# EAGLE board PCB1 v28 (EAGLE 9.7.0)
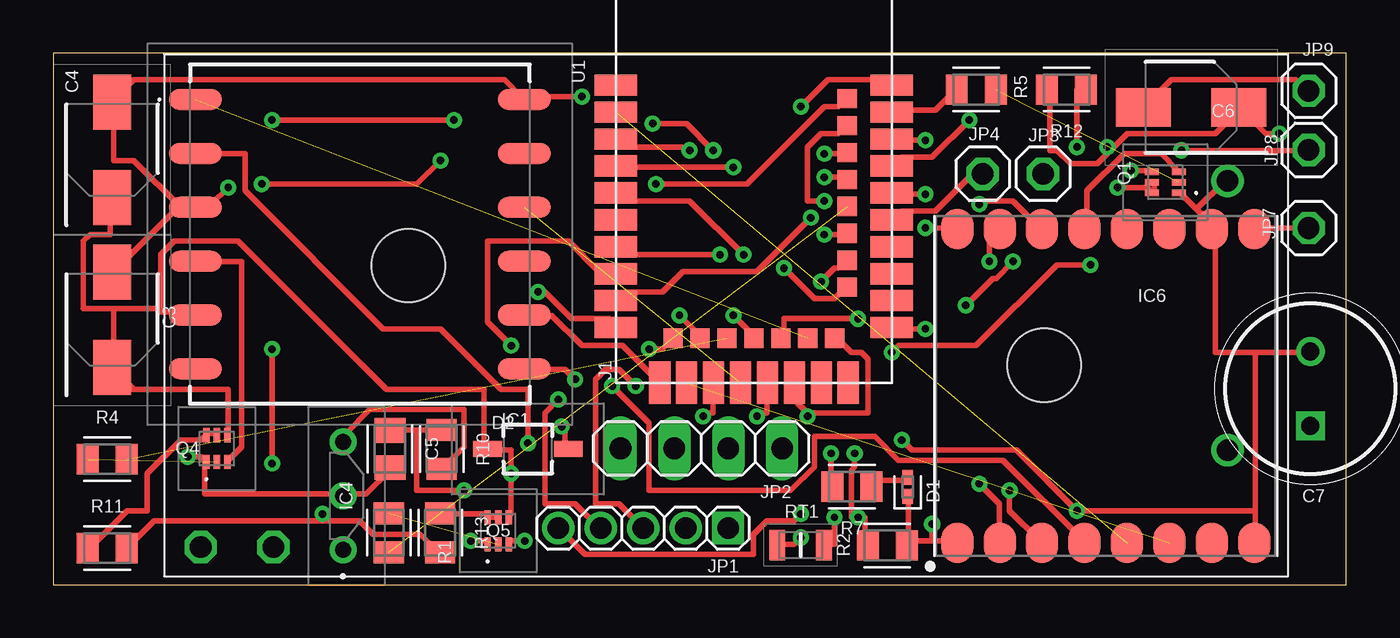
[diagram p0: board, top side]
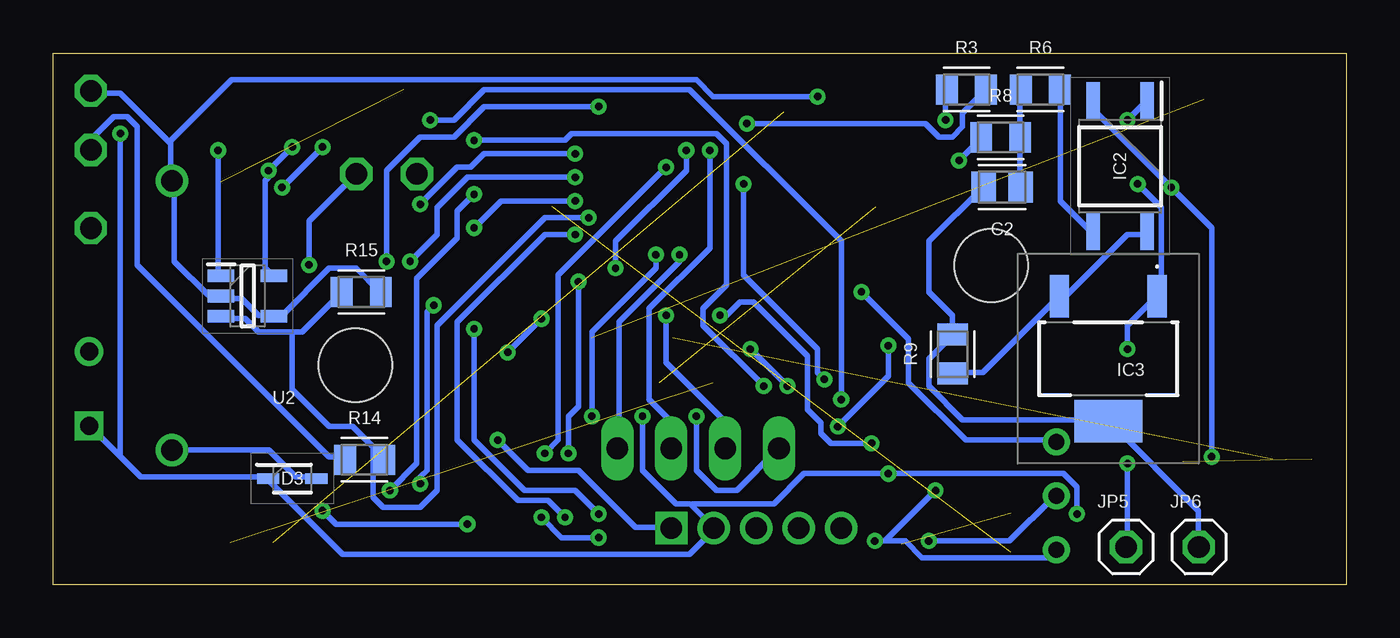
[diagram p1: board, bottom side, seen from below]

Size 60.96 x 25.07 mm. Coordinates in mm from the lower left corner, seen from the top.
Outline: 0,0 60.96,0 60.96,25.07 0,25.07 0,0
Copper layers (1*16): Top / Bottom
Stack-up Default Layer Stack: Top CuFoil:007 0.035mm / Dielectric-1 FR-4 0.2mm / Bottom CuFoil:007 0.035mm
Design rules: minimum copper width class=0 10mil, minimum copper width 6mil, minimum drill size 0.35mm, copper clearance wire_polygon to wire_polygon 8mil, copper clearance wire_polygon to pad_smd 8mil, copper clearance wire_polygon to via 8mil, copper clearance pad_smd to pad_smd 8mil, copper clearance pad_smd to via 8mil, copper clearance via to via 8mil, copper clearance smd to pad (same net) 8mil, copper clearance smd to via (same net) 8mil, copper clearance smd to smd (same net) 8mil, dimension clearance 40mil, via restrict clearance 0mil, restrict clearance 0mil, drill distance 6mil, keepout clearance 0mil
Net classes: 0 default: width 0.254 mm

## Footprints (pad centres in the part's own frame; a part is rotated, then mirrored left to right if it is on the bottom)
CAPC2012X110 = smd 1.165 x 1.465: 1 -0.875,0; 2 0.875,0
CAPAE430X610N = smd 2.6 x 1.8: 1 -2.25,0; 2 2.25,0
CAPPRD350W65D800H2000 = drill 0.85 pad 1.275 square: 1 0,0 | drill 0.85 pad 1.275: 2 3.5,0
LEDC1005X25N_FLAT-B = smd 0.7 x 0.5: A 0.45,0; C -0.45,0
VEMD2023X01 = smd 1.35 x 0.75: 1 -1.9,0; 2 1.9,0
SOD2513X115N = smd 1.05 x 0.5: 1 -1.138,0; 2 1.138,0
LC86LICMD = smd 2.5 x 1: 1 7.75,-6.35; 2 7.75,-3.81; 3 7.75,-1.27; 4 7.75,1.27; 5 7.75,3.81; 6 7.75,6.35; 7 -7.75,6.35; 8 -7.75,3.81; 9 -7.75,1.27; 10 -7.75,-1.27; 11 -7.75,-3.81; 12 -7.75,-6.35
SOP254P675X240-4N = smd 1.75 x 0.65: 1 -3.075,1.27; 2 -3.075,-1.27; 3 3.075,-1.27; 4 3.075,1.27
ACS1088SPTR = smd 0.9 x 2: 1 -2.3,-2.95; 2 2.3,-2.95 | smd 3.2 x 2: 3 0,2.95
HAL1503UAA = drill 0.76 pad 1.2: 1 0,0; 2 2.54,0; 3 5.08,0
SOT95P280X110-5N = smd 1.25 x 0.6: 1 -1.25,0.95; 2 -1.25,0; 3 -1.25,-0.95; 4 1.25,-0.95; 5 1.25,0.95
2468 = drill 1.02 pad 1.53: 1 23.625,-6.35; 2 23.625,6.35 | hole 3.45: -14.985,2.35; 14.985,-2.35
1_05X2MM = drill 1.016 pad 1.3 square: 1 -4,0 | drill 1.016 pad 1.3: 2 -2,0; 3 0,0; 4 2,0; 5 4,0
1X04 = drill 1.016 long: 1 -3.81,0; 2 -1.27,0; 3 1.27,0; 4 3.81,0
1X01 = drill 1.016 octagon: 1 0,0
DMG1029SVQ7 = smd 0.3 x 0.67: 1 -0.5,-0.635; 2 0,-0.635; 3 0.5,-0.635; 4 0.5,0.635; 5 0,0.635; 6 -0.5,0.635
RESC2012X65 = smd 1.031 x 1.42: 1 -0.919,0; 2 0.919,0
THRMC2012X95N = smd 0.75 x 1.45: 1 -1.1,0; 2 1.1,0
E73-2G4M08S1C = smd 2 x 1: 1 -6.5,5.03; 2 -6.5,3.76; 3 -6.5,2.49; 4 -6.5,1.22; 5 -6.5,-0.05; 6 -6.5,-1.32; 7 -6.5,-2.59; 8 -6.5,-3.86; 9 -6.5,-5.13; 10 -6.5,-6.4; 26 6.5,-6.4; 27 6.5,-5.13; 29 6.5,-3.86; 31 6.5,-2.59; 33 6.5,-1.32; 35 6.5,-0.05; 37 6.5,1.22; 39 6.5,2.49; 41 6.5,3.76; 43 6.5,5.03 | smd 1 x 2: 11 -4.44,-9; 13 -3.17,-9; 15 -1.9,-9; 17 -0.63,-9; 19 0.64,-9; 21 1.91,-9; 23 3.18,-9; 25 4.45,-9 | smd 0.9 x 0.9: 12 -3.81,-6.9; 14 -2.54,-6.9; 16 -1.27,-6.9; 18 0,-6.9; 20 1.27,-6.9; 22 2.54,-6.9; 24 3.81,-6.9; 28 4.4,-4.495; 30 4.4,-3.225; 32 4.4,-1.955; 34 4.4,-0.685; 36 4.4,0.585; 38 4.4,1.855; 40 4.4,3.125; 42 4.4,4.395
FP-SX1726-MOD = smd 1.917 x 1.537: 1 -7.4,7; 2 -7.4,5; 3 -7.4,3; 4 -7.4,1; 5 -7.4,-1; 6 -7.4,-3; 7 -7.4,-5; 8 -7.4,-7; 9 7.4,-7; 10 7.4,-5; 11 7.4,-3; 12 7.4,-1; 13 7.4,1; 14 7.4,3; 15 7.4,5; 16 7.4,7

## Placement (x,y rotation side)
C2  [CAPC2012X110]  16.23,18.75 180 bottom
C3  EEE-HP0J100R  [CAPAE430X610N]  2.79,12.49 90 top
C4  EEE-HP0J100R  [CAPAE430X610N]  2.78,20.5 90 top
C5  [CAPC2012X110]  15.88,6.4 270 top
C6  EEE-HP0J100R  [CAPAE430X610N]  53.64,22.5 180 top
C7  ADCR-S03R0SA305MB  [CAPPRD350W65D800H2000]  59.27,7.49 90 top
D1  LED_BLUE  [LEDC1005X25N_FLAT-B]  40.28,4.61 90 top
D2  VEMD2023X01  [VEMD2023X01]  22.38,6.41 0 top
D3  CUS520,H3F  [SOD2513X115N]  49.68,5 0 bottom
IC1  LC86LICMD  [LC86LICMD]  14.46,16.53 180 top
IC2  VOT8024AM-T  [SOP254P675X240-4N]  10.67,19.74 270 bottom
IC3  ACS108-8SP-TR  [ACS1088SPTR]  11.23,10.66 180 bottom
IC4  HAL1503UA-A  [HAL1503UAA]  13.66,1.65 90 top
IC6  TPS78230DDCT  [SOT95P280X110-5N]  51.79,13.61 0 bottom
J1  2468  [2468]  31.72,12.7 0 top
JP1  PINHD-1X55X2MM  [1_05X2MM]  27.81,2.67 180 top
JP2  PINHD-1X4  [1X04]  30.56,6.43 180 top
JP3  PINHD-1X1  [1X01]  46.66,19.38 0 top
JP4  PINHD-1X1  [1X01]  43.82,19.38 0 top
JP5  PINHD-1X1  [1X01]  10.39,1.78 0 bottom
JP6  PINHD-1X1  [1X01]  6.96,1.78 0 bottom
JP7  PINHD-1X1  [1X01]  59.18,16.81 0 top
JP8  PINHD-1X1  [1X01]  59.18,20.5 0 top
JP9  PINHD-1X1  [1X01]  59.18,23.29 0 top
Q1  DMG1029SVQ-7  [DMG1029SVQ7]  52.43,18.97 90 top
Q4  DMG1029SVQ-7  [DMG1029SVQ7]  7.72,6.42 0 top
Q5  DMG1029SVQ-7  [DMG1029SVQ7]  20.98,2.54 0 top
R1  [RESC2012X65]  15.83,2.45 270 top
R2  100K  [RESC2012X65]  39.32,1.85 180 top
R3  200R  [RESC2012X65]  17.91,23.34 0 bottom
R4  [RESC2012X65]  2.55,5.92 0 top
R5  [RESC2012X65]  43.51,23.34 180 top
R6  [RESC2012X65]  14.43,23.34 0 bottom
R7  1k  [RESC2012X65]  37.66,4.62 180 top
R8  [RESC2012X65]  16.3,21.09 0 bottom
R9  [RESC2012X65]  18.56,10.87 90 bottom
R10  [RESC2012X65]  18.31,6.39 270 top
R11  [RESC2012X65]  2.55,1.73 0 top
R12  [RESC2012X65]  47.76,23.34 180 top
R13  [RESC2012X65]  18.25,2.45 270 top
R14  200k  [RESC2012X65]  46.28,5.89 0 bottom
R15  100k  [RESC2012X65]  46.43,13.8 0 bottom
RT1  NTCS0805E3104JXT  [THRMC2012X95N]  35.23,1.87 0 top
U1  E73-2G4M08S1C  [E73-2G4M08S1C]  33.03,18.52 0 top
U2  SX1276S8S-UPDATED  [FP-SX1726-MOD]  49.62,9.37 90 top

## Library data of the parts
C2 C5 = Capacitor; CATEGORY: Capacitor
C3 C4 C6 = EEE-HP0J100R; DESCRIPTION: Aluminum Electrolytic Capacitors - SMD Al Lytic Cap 105C SMT BP-HB Series; HEIGHT: 6.1mm; MANUFACTURER_NAME: Panasonic; MANUFACTURER_PART_NUMBER: EEE-HP0J100R; MOUSER_PART_NUMBER: 667-EEE-HP0J100R; MOUSER_PRICE-STOCK: https://www.mouser.co.uk/ProductDetail/Panasonic/EEE-HP0J100R?qs=GoZnPdyRfjb6sZlAqWVWuQ%3D%3D
C7 = ADCR-S03R0SA305MB; DESCRIPTION: CAP 3F 3V TH; HEIGHT: 20mm; MANUFACTURER_NAME: ABRACON; MANUFACTURER_PART_NUMBER: ADCR-S03R0SA305MB; MOUSER_PART_NUMBER: 815-ADCRS03R0SA305MB; MOUSER_PRICE-STOCK: https://www.mouser.co.uk/ProductDetail/ABRACON/ADCR-S03R0SA305MB?qs=11PymoJGorJFz5koTqmlDw%3D%3D
D1 = LED; CATEGORY: LED; COLOR: BLUE; DESCRIPTION: CHIP LED FLAT; SUB-CATEGORY: CHIP; TYPE: FLAT_TOP
D2 = VEMD2023X01; DESCRIPTION: Photodiodes Gullwing 750-1050nm +/-35 deg; HEIGHT: 2.7mm; MANUFACTURER_NAME: Vishay; MANUFACTURER_PART_NUMBER: VEMD2023X01; MOUSER_PART_NUMBER: 78-VEMD2023X01; MOUSER_PRICE-STOCK: https://www.mouser.co.uk/ProductDetail/Vishay-Semiconductors/VEMD2023X01?qs=5csRq1wdUj7rHVLzT8%252Bxcw%3D%3D
D3 = CUS520_H3F; DESCRIPTION: Schottky Diodes & Rectifiers Single Low Leakge; HEIGHT: 1.15mm; MANUFACTURER_NAME: Toshiba; MANUFACTURER_PART_NUMBER: CUS520,H3F; MOUSER_PART_NUMBER: 757-CUS520H3F; MOUSER_PRICE-STOCK: https://www.mouser.co.uk/ProductDetail/Toshiba/CUS520H3F?qs=cW4DzVrAanMh8DRQGiUcZw%3D%3D
IC1 = LC86LICMD; DESCRIPTION: Quectel Wireless Solutions; HEIGHT: 7.05mm; MANUFACTURER_NAME: Quectel; MANUFACTURER_PART_NUMBER: LC86LICMD; MOUSER_PART_NUMBER: 277-LC86LICMD; MOUSER_PRICE-STOCK: https://www.mouser.co.uk/ProductDetail/Quectel/LC86LICMD?qs=iLbezkQI%252BsiFPFQjIwBL1Q%3D%3D
IC2 = VOT8024AM-T; DESCRIPTION: Triac & SCR Output Optocouplers 800V Vrdm Phototriac SOP-4; UL, cUL; HEIGHT: 2.4mm; MANUFACTURER_NAME: Vishay; MANUFACTURER_PART_NUMBER: VOT8024AM-T; MOUSER_PART_NUMBER: 78-VOT8024AM-T; MOUSER_PRICE-STOCK: https://www.mouser.co.uk/ProductDetail/Vishay-Semiconductors/VOT8024AM-T?qs=byeeYqUIh0N%252Bs3wUufxnOA%3D%3D
IC3 = ACS108-8SP-TR; DESCRIPTION: Overvoltage protected AC Switch 0.8 A - 800 V in SOT223-2L high creepage package; HEIGHT: 1.8mm; MANUFACTURER_NAME: STMicroelectronics; MANUFACTURER_PART_NUMBER: ACS108-8SP-TR; MOUSER_PART_NUMBER: 511-ACS108-8SP-TR; MOUSER_PRICE-STOCK: https://www.mouser.co.uk/ProductDetail/STMicroelectronics/ACS108-8SP-TR?qs=pBunHO6%252BwtF6H7n0e1joeA%3D%3D
IC4 = HAL1503UA-A; DESCRIPTION: Board Mount Hall Effect / Magnetic Sensors; HEIGHT: 4.4mm; MANUFACTURER_NAME: TDK; MANUFACTURER_PART_NUMBER: HAL1503UA-A; MOUSER_PART_NUMBER: 586-HAL1503UA-A; MOUSER_PRICE-STOCK: https://www.mouser.co.uk/ProductDetail/TDK-Micronas/HAL1503UA-A?qs=u%2FaXZZupywzQZMZFxYZolA%3D%3D
IC6 = TPS78230DDCT; DESCRIPTION: Texas Instruments TPS78230DDCT, LDO Voltage Regulator, 150mA, 3.3 V +/-3%, 2.2 5.5 Vin, 5-Pin SOT; HEIGHT: 1.1mm; MANUFACTURER_NAME: Texas Instruments; MANUFACTURER_PART_NUMBER: TPS78230DDCT; MOUSER_PART_NUMBER: 595-TPS78230DDCT; MOUSER_PRICE-STOCK: https://www.mouser.co.uk/ProductDetail/Texas-Instruments/TPS78230DDCT?qs=IDSsxkoac0x7lC1vOYClMg%3D%3D
J1 = 2468; DESCRIPTION: Cylindrical Battery Contacts, Clips, Holders & Springs 2AAA PC MNT HOLDER; HEIGHT: mm; MANUFACTURER_NAME: Keystone Electronics; MANUFACTURER_PART_NUMBER: 2468; MOUSER_PART_NUMBER: 534-2468; MOUSER_PRICE-STOCK: https://www.mouser.co.uk/ProductDetail/Keystone-Electronics/2468?qs=3CbvriavsLAoISGi3MywrQ%3D%3D
JP1 = Connector; CATEGORY: Headers; DESCRIPTION: Header, Straight, 5 Position; MANUFACTURER: Generic; MPN: Generic; OPERATING_TEMPERATURE: Generic; PART_STATUS: Active; PITCH: 0.079" (2.00mm); ROHS_COMPLIANCE: Generic; SERIES: Generic; SUB-CATEGORY: Headers, Male Pins; TYPE: Board to Board or Cable, Unshrouded, Through Hole, Straight
JP2 = Connector; CATEGORY: Headers; DESCRIPTION: Header, Straight, 4 Position; MANUFACTURER: Generic; MPN: Generic; OPERATING_TEMPERATURE: Generic; PART_STATUS: Active; PITCH: 0.100" (2.54mm); ROHS_COMPLIANCE: Generic; SERIES: Generic; SUB-CATEGORY: Headers, Male Pins; TYPE: Board to Board or Cable, Unshrouded, Through Hole, Straight
JP3-JP9 = Connector; CATEGORY: Headers; DESCRIPTION: Header, Straight, 1 Position; MANUFACTURER: Generic; MPN: Generic; OPERATING_TEMPERATURE: Generic; PART_STATUS: Active; PITCH: 0.100" (2.54mm); ROHS_COMPLIANCE: Generic; SERIES: Generic; SUB-CATEGORY: Headers, Male Pins; TYPE: Board to Board or Cable, Unshrouded, Through Hole, Straight
Q1 Q4 Q5 = DMG1029SVQ-7; DESCRIPTION: Mosfet Array 60V 500mA (Ta), 360mA (Ta) 450mW (Ta) Surface Mount SOT-563; HEIGHT: 0.6mm; MANUFACTURER_NAME: Diodes Incorporated; MANUFACTURER_PART_NUMBER: DMG1029SVQ-7; MOUSER_PART_NUMBER: 621-DMG1029SVQ-7; MOUSER_PRICE-STOCK: https://www.mouser.co.uk/ProductDetail/Diodes-Incorporated/DMG1029SVQ-7?qs=u16ybLDytRbBaAc3KwCTwA%3D%3D
R1-R15 = Tutorial - Fusion 360; CATEGORY: Resistor; SUB-CATEGORY: Fixed
RT1 = NTCS0805E3104JXT; DESCRIPTION: NTC Thermistors 100Kohms 5% SMD; HEIGHT: 0.95mm; MANUFACTURER_NAME: Vishay; MANUFACTURER_PART_NUMBER: NTCS0805E3104JXT; MOUSER_PART_NUMBER: 594-NTCS0805E3104JXT; MOUSER_PRICE-STOCK: https://www.mouser.co.uk/ProductDetail/Vishay-BC-Components/NTCS0805E3104JXT?qs=Y0gyZw6qHXedwsSst0X8tA%3D%3D
U1 = E73-2G4M08S1C; AVAILABILITY: Not in stock; CHECK_PRICES: https://www.snapeda.com/parts/E73-2G4M08S1C/EBYTE/view-part/?ref=eda; DESCRIPTION: E73 series are wireless Bluetooth modules designed by Chengdu Ebyte which feature small size, low power consumption, built-in PCB antenna and IPX interface; MF: EBYTE; MP: E73-2G4M08S1C; PACKAGE: Package; PRICE: None; SNAPEDA_LINK: https://www.snapeda.com/parts/E73-2G4M08S1C/EBYTE/view-part/?ref=snap
U2 = Library

## Nets
DIO0: U1.36 U2.15
DIO1: U1.38 U2.14
DIO2: U1.40 U2.16
FORCE_GPS: IC1.7 U1.42
GND: C3.2 C4.2 C5.2 C6.2 C7.2 D1.C IC1.3 IC1.12 IC2.2 IC4.2 IC6.2 IC6.4 J1.2 JP1.1 JP9.1 Q1.1 Q4.1 Q5.1 R2.1 R15.2 U2.1 U2.8 U2.10
GPS_ANT_OK: IC1.8 U1.11
GPSPWR: R4.2 U1.16
LORAPWR: R5.2 U1.41
MISO: U1.35 U2.3
MOSI: U1.43 U2.2
N$1: Q1.3 U2.13
N$2: Q1.2 R5.1
N$3: Q4.5 Q4.6 R11.1
N$4: IC1.4 Q4.3
N$5: R2.2 RT1.1 U1.4
N$6: JP1.5 U1.26
N$7: D1.A R7.1
N$8: JP1.4 U1.37
N$9: JP1.3 U1.39
N$10: JP2.1 U1.7
N$11: JP2.2 U1.3
N$12: JP2.3 U1.18
N$13: JP2.4 U1.15
N$14: JP3.1 U1.20
N$15: JP4.1 U1.33
N$16: IC2.1 R3.1
N$17: D2.2 U1.8
N$18: R3.2 U1.28
N$19: R7.2 U1.30
N$20: RT1.2 U1.32
N$21: C2.1 R6.1 R8.2
N$22: IC2.4 IC3.2 R9.1
N$23: C2.2 IC3.3 JP6.1 R9.2
N$24: IC3.1 JP5.1 R8.1
N$25: IC2.3 R6.2
N$26: C5.1 IC4.1 Q5.3 R10.1
N$27: Q5.2 R1.1
N$28: IC4.3 R10.2 U1.10
N$29: R1.2 U1.34
N$30: Q4.2 R4.1
N$31: Q1.5 Q1.6 R12.1
N$32: Q5.5 Q5.6 R13.1
N$33: IC6.3 R14.2 R15.1 U1.9
N$34: U1.5 U1.21 U1.24
N$35: D3.2 J1.1
N$36: IC6.1 JP8.1 R14.1
N$37: JP7.1 U2.9
NSS: U1.2 U2.5
RESET_GPS: IC1.10 U1.17
RST: U1.13 U2.6
RXD: IC1.1 U1.22
SCK: U1.12 U2.4
TXD: IC1.2 U1.14
VCC: C3.1 C4.1 C6.1 C7.1 D2.1 D3.1 IC1.5 IC6.5 JP1.2 Q1.4 Q4.4 Q5.4 R11.2 R12.2 R13.2 U1.19

## Tracks (layer width: path | path; a pad name or v marks a point on that pad's centre or on a via)
DIO0  (via drill 0.35)
  Top 0.254: v36.35,19.21 37.31,19.21 U1.36 | v44.13,15.24 44.13,16.67 44.61,16.67 U2.15
  Bottom 0.254: v36.35,19.21 41.43,19.21 42.86,17.78 42.86,16.51 v44.13,15.24
DIO1  (via drill 0.35)
  Top 0.254: v36.35,20.32 37.31,20.32 U1.38 | v43.66,17.94 43.82,18.1 45.24,18.1 46.51,16.83 U2.14
  Bottom 0.254: v36.35,20.32 40.64,20.32 41.28,19.68 41.91,19.68 v43.66,17.94
DIO2  (via drill 0.35)
  Top 0.254: v36.35,18.1 35.56,18.1 35.56,20.64 36.2,21.27 36.99,21.27 37.31,21.59 U1.40 | v41.12,16.83 42.55,16.83 U2.16
  Bottom 0.254: v36.35,18.1 39.85,18.1 v41.12,16.83
FORCE_GPS  (via drill 0.35)
  Top 0.254: v28.42,18.89 32.7,18.89 36.35,22.54 36.99,22.54 37.31,22.86 U1.42 | v24.61,9.68 24.13,10.16 22.22,10.16 IC1.7
  Bottom 0.254: v28.42,18.89 28.42,14.6 24.92,11.11 24.92,10 v24.61,9.68
GND  (via drill 0.35)
  Top 0.254: v19.68,2.06 20.48,2.06 Q5.1 | C5.2 15.88,5.4 14.76,4.29 13.81,4.29 IC4.2 13.65,4.29 7.14,4.29 7.14,5.71 Q4.1 7.14,5.87 6.98,6.03 v6.35,6.03 | v8.26,18.73 7.46,17.94 6.83,17.94 IC1.3 | 6.03,17.78 6.67,17.78 IC1.3 | 6.03,17.78 5.87,17.78 2.86,14.76 C3.2 | 6.03,17.78 3.81,20 2.86,20 2.86,22.7 C4.2 2.86,22.86 3.81,23.81 21.27,23.81 22.07,23.02 IC1.12 22.22,23.02 v24.92,23.02 | 6.03,17.78 IC1.3 | C6.2 51.44,22.54 52.71,23.81 58.58,23.81 59.05,23.34 JP9.1 | 53.9,17.7 54.77,16.83 U2.10 54.77,16.67 54.77,10.95 56.67,10.95 | 53.9,17.7 53.18,18.41 Q1.1 | 53.9,17.7 55.25,19.05 J1.2 | 40.32,2.06 40.32,1.9 R2.1 40.32,2.06 | 40.32,2.06 40.32,4.13 D1.C | 40.32,2.06 41.43,2.06 | 41.43,2.06 42.55,2.06 U2.1 | 56.67,10.95 56.67,3.49 | 56.67,3.49 56.67,2.06 U2.8 | 56.67,10.95 59.21,10.95 C7.2 | v41.43,2.86 41.43,2.06 | 56.67,3.49 v48.26,3.49 45.4,6.35 40.48,6.35 v40.01,6.83
  Bottom 0.254: v19.68,2.06 15.88,2.06 13.81,4.13 IC4.2 | IC2.2 11.91,22.7 11.91,22.38 v8.26,18.73 6.35,16.83 v6.35,6.03 | R15.2 45.56,13.81 46.67,14.92 47.94,14.92 50.17,12.7 50.48,12.7 IC6.4 50.64,12.7 51.28,12.7 52.07,13.49 53.02,13.49 IC6.2 53.18,13.65 53.66,13.65 55.25,15.24 55.25,19.05 J1.2 55.4,19.05 55.4,20.8 55.48,20.88 | v41.43,2.86 47.62,2.86 v48.26,3.49 | v40.01,6.83 38.58,5.4 36.2,5.4 33.5,2.7 31.91,2.7 JP1.1 | 55.48,20.88 57.79,23.18 59.05,23.18 JP9.1 | v24.92,23.02 29.84,23.02 30.64,23.81 52.55,23.81 55.48,20.88
GPS_ANT_OK
  Top 0.254: U1.11 28.57,9.52 26.83,11.27 24.92,11.27 23.5,12.7 22.22,12.7 IC1.8
GPSPWR  (1 unrouted)
LORAPWR
  Top 0.254: R5.2 42.55,23.34 41.59,22.38 39.69,22.38 U1.41
MISO  (via drill 0.35)
  Top 0.254: v45.09,4.44 45.09,3.49 46.51,2.06 U2.3 | v41.12,18.41 39.69,18.41 U1.35
  Bottom 0.254: v45.09,4.44 43.82,5.71 43.82,14.45 41.91,16.35 41.91,17.62 v41.12,18.41
MOSI  (via drill 0.35)
  Top 0.254: v43.66,4.76 44.61,3.81 44.61,2.06 U2.2 | v43.02,13.18 44.29,14.45 44.45,14.45 v45.24,15.24 | v35.24,22.54 36.51,23.81 39.37,23.81 39.53,23.65 U1.43
  Bottom 0.254: v43.66,4.76 43.66,5.08 43.34,5.4 43.34,12.86 v43.02,13.18 | v45.24,15.24 45.24,19.53 43.66,21.11 42.07,21.11 40.64,22.54 v35.24,22.54
N$1
  Top 0.254: Q1.3 53.02,19.53 52.23,20.32 50.48,20.32 48.74,18.57 48.74,16.83 U2.13
N$2  (1 unrouted)
N$3
  Top 0.254: Q4.5 7.62,7.14 7.3,7.14 Q4.6 7.14,6.98 6.98,6.83 6.03,6.83 4.45,5.24 4.45,3.49 3.49,3.49 1.75,1.75 R11.1
N$4
  Top 0.254: Q4.3 8.26,5.87 8.89,6.51 8.89,15.24 6.83,15.24 IC1.4
N$5  (via drill 0.35)
  Top 0.254: v35.24,2.22 34.93,1.9 34.13,1.9 RT1.1 | R2.2 38.26,1.9 38.26,3.17 v37.94,3.17 37.62,3.17 37.62,5.4 37.78,5.56 v37.78,6.19 | v32.07,19.68 26.67,19.68 U1.4
  Bottom 0.254: v37.94,3.17 36.99,2.22 v35.24,2.22 | v32.07,19.68 37.15,14.6 37.15,6.83 v37.78,6.19
N$6  (via drill 0.35)
  Top 0.254: v41.12,12.06 39.69,12.06 U1.26 | v35.24,3.33 34.93,3.02 33.66,3.02 33.02,2.38 33.02,1.43 25.08,1.43 23.97,2.54 JP1.5
  Bottom 0.254: v41.12,12.06 41.12,6.83 38.74,4.44 36.35,4.44 v35.24,3.33
N$7
  Top 0.254: D1.A 40.16,4.92 38.74,4.92 38.58,4.76 R7.1
N$8  (via drill 0.35)
  Top 0.254: v43.18,21.91 41.43,20.16 40.01,20.16 39.69,19.84 U1.37 | v23.81,8.73 23.18,8.1 23.18,3.81 24.61,3.81 25.72,2.7 JP1.4
  Bottom 0.254: v43.18,21.91 42.07,21.91 40.64,23.34 30.96,23.34 23.81,16.19 v23.81,8.73
N$9  (via drill 0.35)
  Top 0.254: v41.12,20.95 39.69,20.95 U1.39 | v27.46,9.37 26.67,10.16 26.04,10.16 25.56,9.68 25.56,3.81 26.67,3.81 27.78,2.7 JP1.3
  Bottom 0.254: v41.12,20.95 36.83,20.95 36.51,21.27 29.69,21.27 29.21,20.8 29.21,14.13 30.32,13.02 30.32,12.22 v27.46,9.37
N$10  (via drill 0.35)
  Top 0.254: v31.43,15.56 26.99,15.56 26.67,15.88 U1.7
  Bottom 0.254: v31.43,15.56 31.43,15.24 34.29,12.38 34.29,6.51 JP2.1
N$11  (via drill 0.35)
  Top 0.254: v30,20.48 29.84,20.64 26.99,20.64 26.67,20.95 U1.3
  Bottom 0.254: v30,20.48 30,15.88 32.86,13.02 32.86,8.73 31.91,7.78 31.91,6.51 JP2.2
N$12  (via drill 0.35)
  Top 0.254: v32.07,12.7 33.02,11.75 U1.18
  Bottom 0.254: v32.07,12.7 32.07,10.48 29.37,7.78 29.37,6.51 JP2.3
N$13  (via drill 0.35)
  Top 0.254: v30.64,7.94 30.8,8.1 31.11,8.1 31.11,9.37 U1.15
  Bottom 0.254: v30.64,7.94 30.64,5.4 29.69,4.44 28.73,4.44 26.83,6.35 JP2.4
N$14  (via drill 0.35)
  Top 0.254: v37.94,12.54 34.45,12.54 34.45,11.75 U1.20 | v39.53,10.95 39.85,11.27 43.5,11.27 47.31,15.08 v48.9,15.08
  Bottom 0.254: v39.53,10.95 v37.94,12.54 | v48.9,15.08 48.9,17.14 JP3.1
N$15
  Top 0.254: U1.33 39.69,17.3 40.01,17.62 41.59,17.62 43.34,19.37 43.82,19.37 JP4.1
N$16  (via drill 0.35)
  Top 0.254: v10.32,21.91 v18.89,21.91
  Bottom 0.254: v18.89,21.91 18.89,23.34 R3.1 | v10.32,21.91 9.53,22.7 IC2.1
N$17  (via drill 0.35)
  Top 0.254: v23.97,7.46 24.13,7.46 24.13,6.51 D2.2 | v21.59,11.27 20.48,12.38 20.48,16.19 24.29,16.19 25.72,14.76 26.51,14.76 U1.8
  Bottom 0.254: v23.97,7.46 21.59,9.84 v21.59,11.27
N$18  (via drill 0.35)
  Top 0.254: v34.45,14.92 35.88,13.49 36.83,13.49 37.31,13.97 U1.28 | v31.11,20.48 29.84,21.75 v28.26,21.75
  Bottom 0.254: v34.45,14.92 34.45,16.19 31.11,19.53 v31.11,20.48 | v28.26,21.75 19.84,21.75 19.21,21.11 18.57,21.11 18.1,21.59 18.1,22.22 R3.2
N$19  (via drill 0.35)
  Top 0.254: v36.2,14.29 36.83,14.92 36.99,14.92 37.31,15.24 U1.30 | v36.67,6.19 36.67,4.76 R7.2
  Bottom 0.254: v36.2,14.29 36.2,8.41 36.67,7.94 v36.67,6.19
N$20  (via drill 0.35)
  Top 0.254: v36.35,16.51 37.31,16.51 U1.32 | v36.83,3.17 36.83,1.9 36.35,1.9 RT1.2
  Bottom 0.254: v36.35,16.51 37.78,16.51 41.91,12.38 41.91,6.83 39.05,3.97 37.62,3.97 v36.83,3.17
N$21
  Bottom 0.254: C2.1 15.4,18.89 15.4,20.95 R8.2 15.4,21.11 15.4,23.34 R6.1
N$22
  Bottom 0.254: R9.1 18.41,10 17.14,10 13.65,13.49 IC3.2 13.49,13.65 13.18,13.65 10.32,16.51 9.53,16.51 IC2.4
N$23
  Bottom 0.254: C2.2 17.14,18.73 19.68,16.19 19.68,13.81 18.57,12.7 18.57,11.91 R9.2 18.57,11.75 19.68,10.64 19.68,9.37 18.1,7.78 11.27,7.78 IC3.3 11.11,7.62 6.98,3.49 6.98,1.9 JP6.1
N$24  (via drill 0.35)
  Top 0.254: v18.26,20 17.14,18.89 v9.84,18.89 | v10.32,11.11 v10.32,5.71
  Bottom 0.254: v18.26,20 17.3,20.95 R8.1 | v9.84,18.89 8.73,17.78 8.73,13.81 8.89,13.65 IC3.1 9.05,13.49 10.32,12.22 v10.32,11.11 | v10.32,5.71 10.32,1.9 JP5.1
N$25
  Bottom 0.254: R6.2 13.49,23.34 13.49,18.1 12.06,16.67 IC2.3
N$26  (via drill 0.35)
  Top 0.254: 17.14,7.3 16.03,7.3 C5.1 | 17.14,7.3 18.26,7.3 R10.1 | v22.22,2.06 21.59,2.06 Q5.3 | 17.14,7.3 17.14,4.44 v19.37,4.44
  Bottom 0.254: 21.75,2.06 20.8,2.06 20,1.27 14.13,1.27 13.81,1.59 IC4.1 | 21.75,2.06 v22.22,2.06 | 21.75,2.06 v19.37,4.44
N$27  (1 unrouted)
N$28  (via drill 0.35)
  Top 0.254: R10.2 18.41,5.56 19.37,6.51 19.37,8.25 14.92,8.25 13.81,7.14 13.81,6.83 IC4.3 | v22.86,13.81 23.18,13.81 24.45,12.54 26.19,12.54 26.51,12.22 U1.10
  Bottom 0.254: v22.86,13.81 20.64,11.59 20.64,9.52 17.94,6.83 13.81,6.83 IC4.3
N$29  (1 unrouted)
N$30  (1 unrouted)
N$31  (via drill 0.35)
  Top 0.254: Q1.5 51.91,18.89 51.91,18.57 Q1.6 51.75,18.57 51.59,18.73 v50.17,18.73 | v48.26,20.64 48.26,23.34 48.58,23.34 R12.1
  Bottom 0.254: v48.26,20.64 v50.17,18.73
N$32
  Top 0.254: Q5.5 20.95,3.17 Q5.6 20.48,3.33 18.26,3.33 R13.1
N$33  (via drill 0.35)
  Top 0.254: v35.72,17.3 33.18,14.76 29.69,14.76 28.73,13.81 26.99,13.81 26.67,13.49 U1.9
  Bottom 0.254: 49.69,11.91 49.21,11.91 47.47,13.65 R15.1 | 49.69,11.91 51.28,11.91 51.91,12.54 53.02,12.54 IC6.3 | 45.8,6.43 46.83,7.46 47.94,7.46 49.69,9.21 49.69,11.91 | 45.8,6.43 45.4,6.03 R14.2 | v35.72,17.3 37.78,17.3 42.86,12.22 42.86,4.44 43.66,3.65 45.4,3.65 45.88,4.13 45.88,6.35 45.8,6.43
N$34  (via drill 0.35)
  Top 0.254: 35.56,8.1 38.42,8.1 38.42,10.64 38.1,10.95 37.62,10.95 36.99,11.59 U1.24 | 35.56,8.1 35.08,8.57 35.08,9.37 U1.21 | v32.54,15.56 30,18.1 26.99,18.1 26.67,18.41 U1.5 | 35.56,8.1 v35.56,7.94
  Bottom 0.254: v32.54,15.56 32.54,14.92 35.56,11.91 v35.56,7.94
N$35
  Bottom 0.254: J1.1 50.8,6.35 49.53,5.08 48.58,5.08 D3.2
N$36  (via drill 0.35)
  Top 0.254: v53.18,20.48 59.05,20.48 JP8.1
  Bottom 0.254: v53.18,20.48 53.18,14.6 IC6.1 | R14.1 47.31,6.03 47.94,6.03 56.99,15.08 56.99,21.59 57.47,22.07 58.1,22.07 59.05,21.11 59.05,20.64 JP8.1
N$37
  Top 0.254: U2.9 56.67,16.83 59.05,16.83 JP7.1
NSS  (1 unrouted)
RESET_GPS  (1 unrouted)
RST  (1 unrouted)
RXD  (1 unrouted)
SCK  (via drill 0.35)
  Top 0.254: v28.1,11.11 28.73,11.11 29.21,11.59 U1.12 | v26.35,9.37 28.1,7.62 28.1,4.44 34.77,4.44 35.88,5.56 35.88,6.98 38.74,6.98 39.85,5.87 44.77,5.87 48.58,2.06 U2.4
  Bottom 0.254: v26.35,9.37 v28.1,11.11
TXD  (via drill 0.35)
  Top 0.254: v29.53,12.7 30.48,11.75 U1.14 | v22.38,6.67 22.38,9.21 21.11,9.21 18.26,12.06 15.56,12.06 9.05,18.57 9.05,20.32 6.83,20.32 IC1.2
  Bottom 0.254: v29.53,12.7 29.21,12.7 28.57,13.33 27.94,13.33 25.4,10.79 25.4,8.25 24.77,7.62 24.77,7.14 24.29,6.67 v22.38,6.67
VCC  (via drill 0.35)
  Top 0.254: Q4.4 8.26,7.14 8.26,9.21 3.81,9.21 2.86,10.16 C3.1 2.86,10.32 2.86,13.02 | Q5.4 21.59,3.33 v21.59,5.24 21.59,6.35 20.48,6.35 D2.1 20.32,6.51 20.32,9.21 15.72,9.21 8.73,16.19 5.71,16.19 5.08,15.56 5.08,13.02 | 5.08,13.02 5.08,12.86 6.67,12.86 IC1.5 | 5.08,13.02 2.86,13.02 | 2.86,13.02 1.43,13.02 1.43,16.19 1.75,16.51 2.7,16.51 2.7,18.1 C4.1 | v50.8,19.53 51.75,19.53 Q1.4 | 49.93,20.56 50.64,21.27 54.77,21.27 55.88,22.38 C6.1 56.04,22.38 57.15,21.27 v57.79,21.27 | 49.93,20.56 49.21,19.84 47.94,19.84 47.31,20.48 46.99,20.48 46.99,23.34 R12.2 | v49.69,20.64 49.85,20.64 49.93,20.56 | 12.7,3.02 14.45,3.02 15.08,2.38 17.3,2.38 18.1,1.59 R13.2 | 12.7,3.02 4.76,3.02 3.49,1.75 R11.2 | v33.18,7.94 33.34,8.1 33.66,8.1 33.66,9.37 U1.19 | v12.7,3.33 12.7,3.02
  Bottom 0.254: IC6.5 50.64,14.6 50.96,14.92 50.96,19.05 50.8,19.21 v50.8,19.53 v49.69,20.64 | 57.86,6.11 59.21,7.46 C7.1 | 57.86,6.11 56.83,5.08 50.96,5.08 D3.1 50.8,4.92 47.31,1.43 30.96,1.43 29.84,2.54 JP1.2 29.84,2.7 30.88,3.73 | v33.18,7.94 33.18,5.4 31.59,3.81 30.96,3.81 30.88,3.73 | v12.7,3.33 12.7,4.6 13.33,5.24 v21.59,5.24 25.56,5.24 26.99,3.81 30.8,3.81 30.88,3.73 | v57.79,21.27 57.79,6.19 57.86,6.11